# Altium PCB GC-Pcb.PcbDoc (part 1 of 3)
Units mm, origin at the board's own origin, x right, y up, seen from the top; angles counter-clockwise.
Board outline 75 x 40 mm, 4 copper layers (Top Copper, GND, PWR, Bottom Copper), stack 1.312 mm thick; 83 components, 62 nets, 306 pads, 137 vias.
Unrouted connection lines stored in the file: 2.
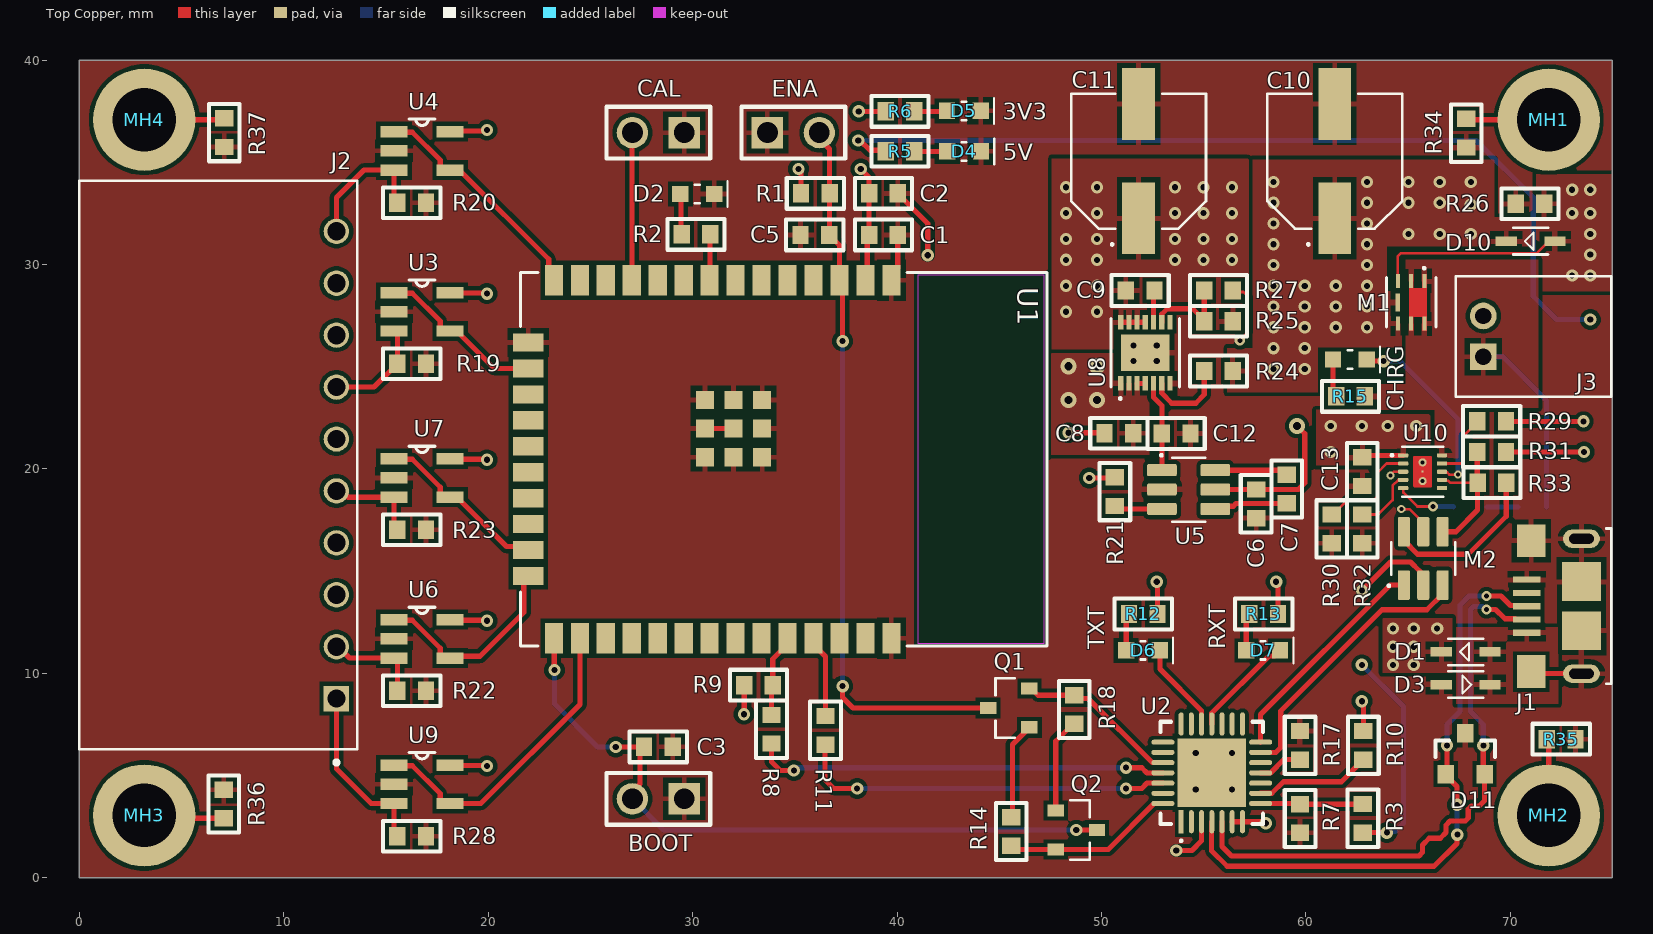
[diagram p0: Top Copper view]
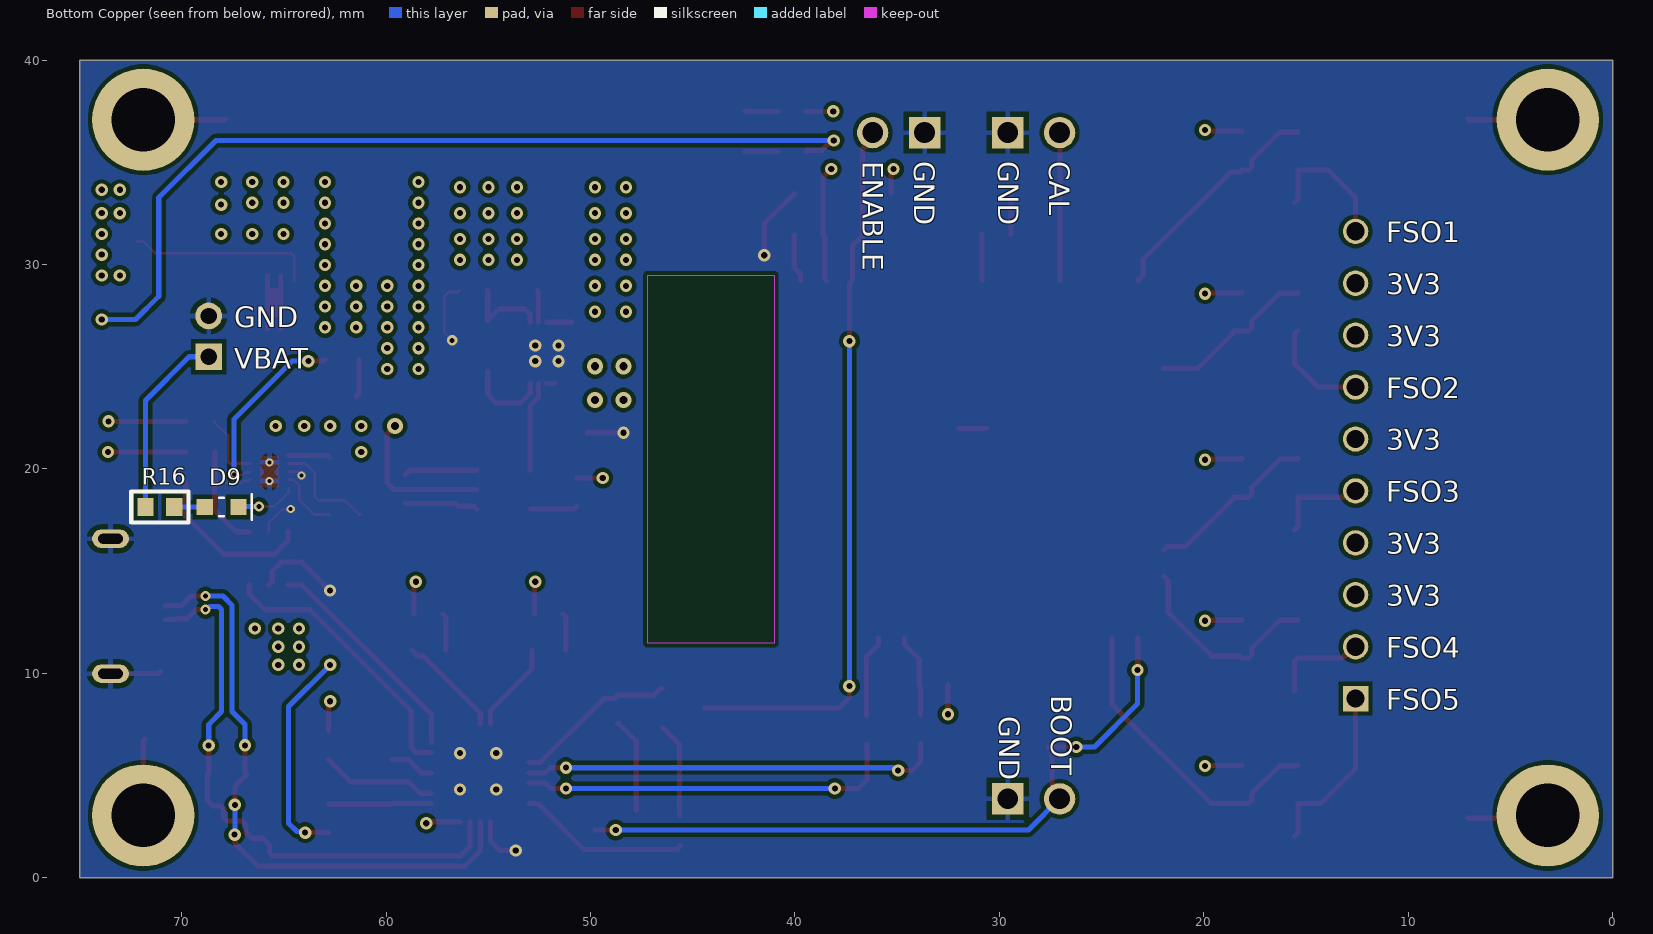
[diagram p1: Bottom Copper view, seen from below]
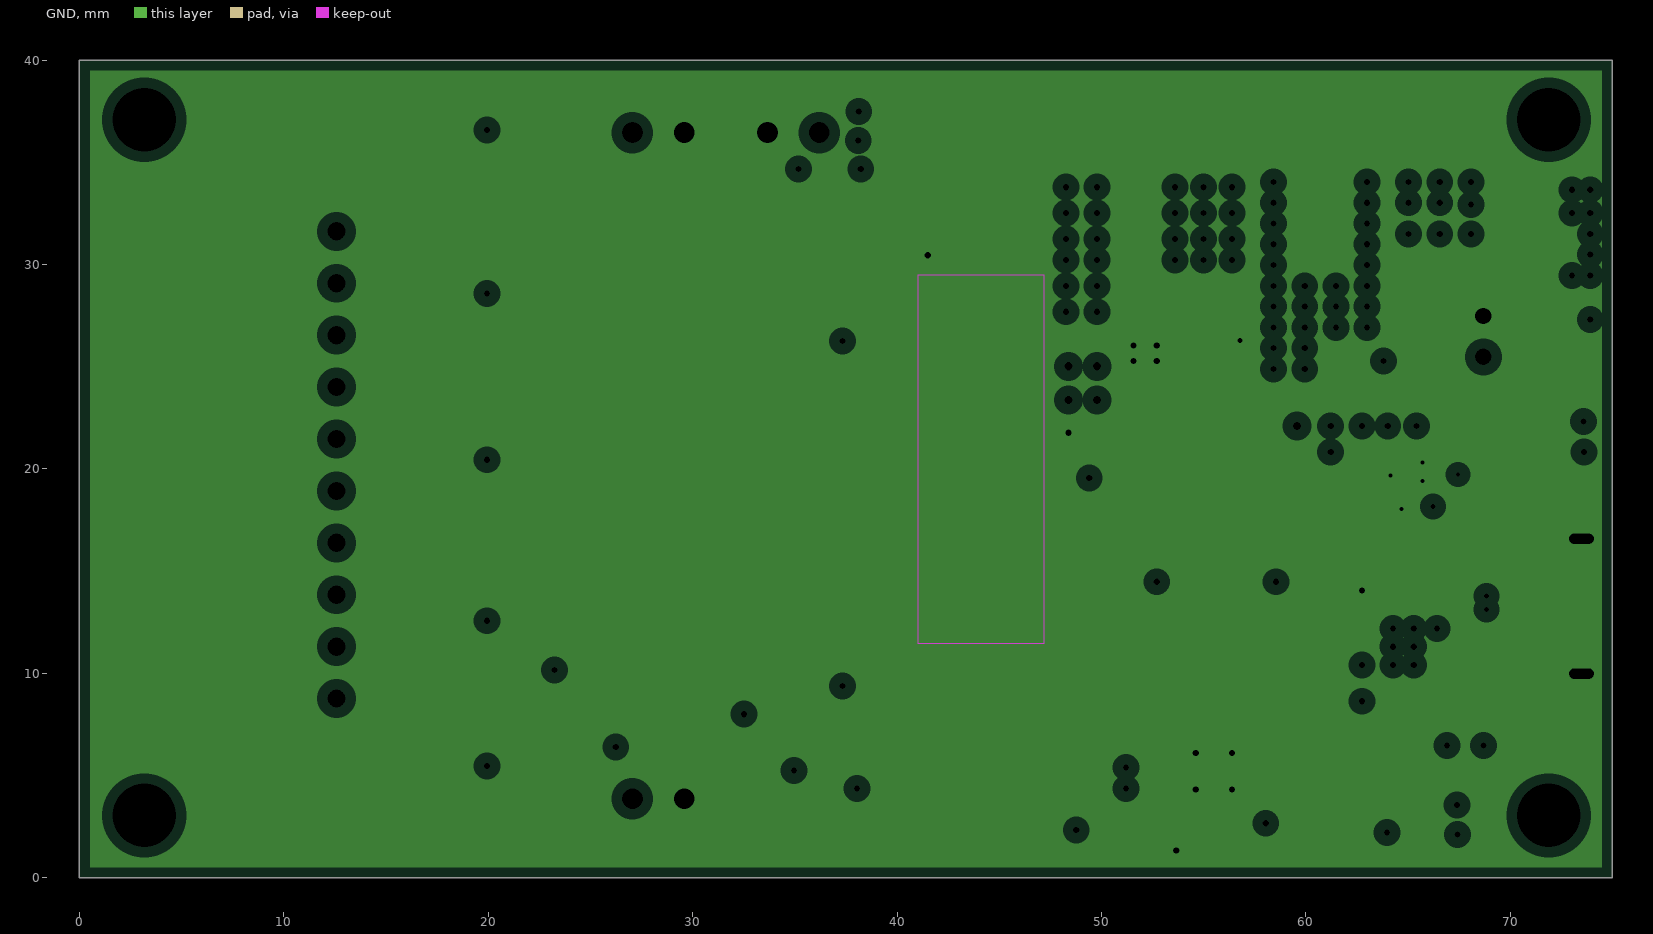
[diagram p2: GND, clearances drawn from the general rule]
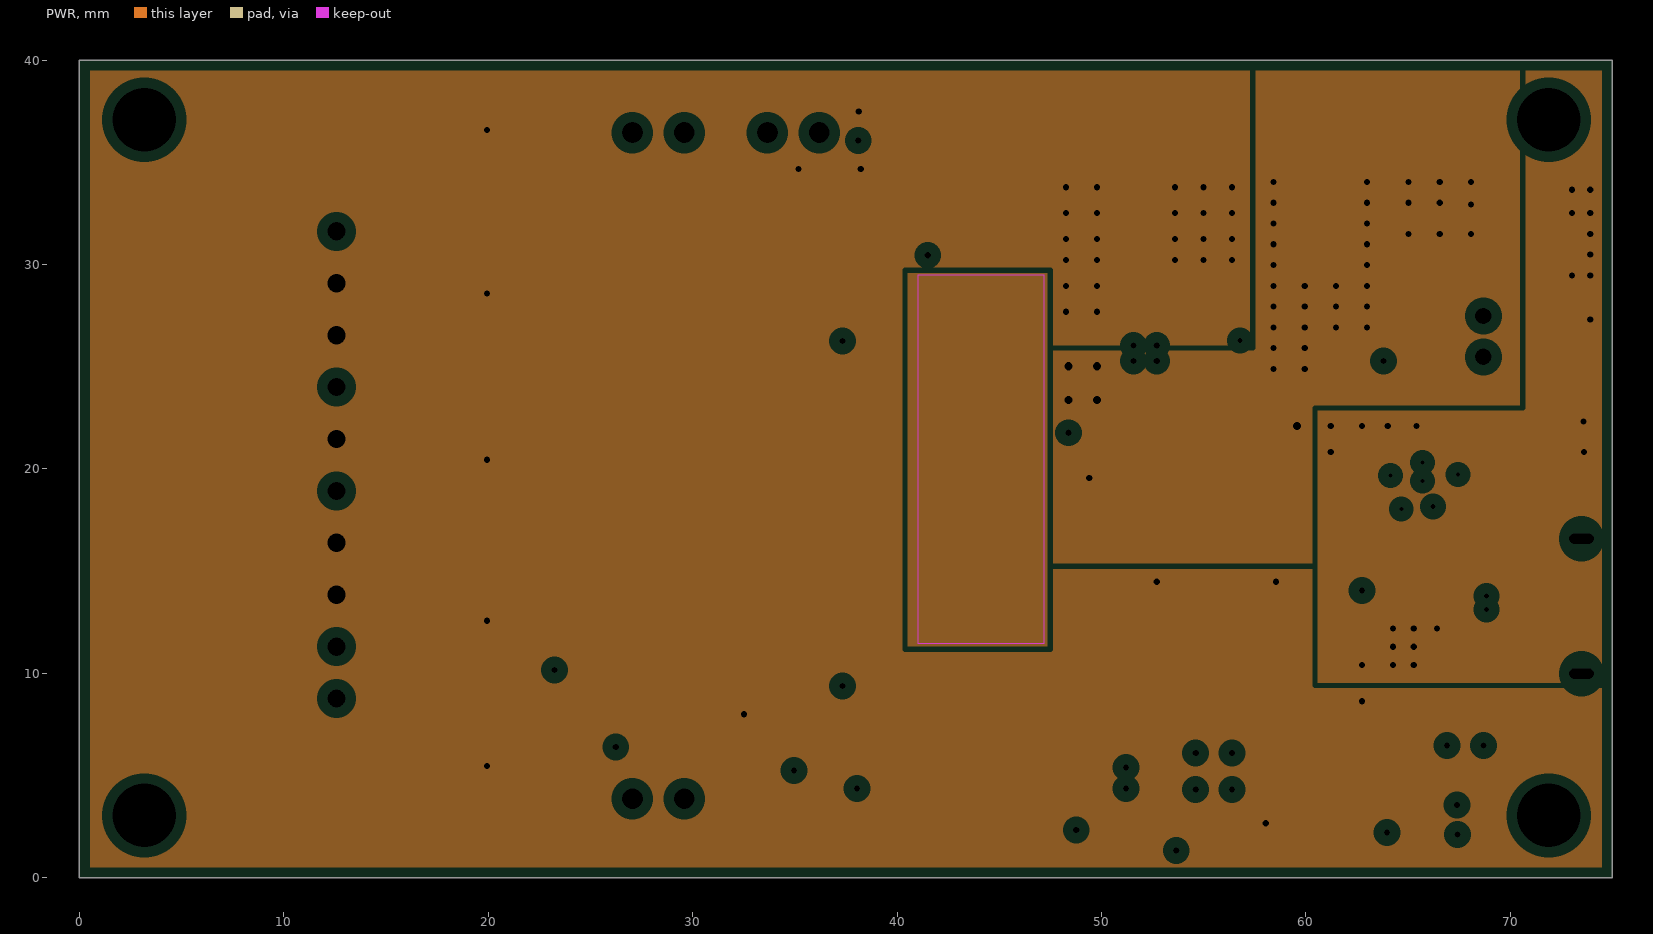
[diagram p3: PWR, clearances drawn from the general rule]
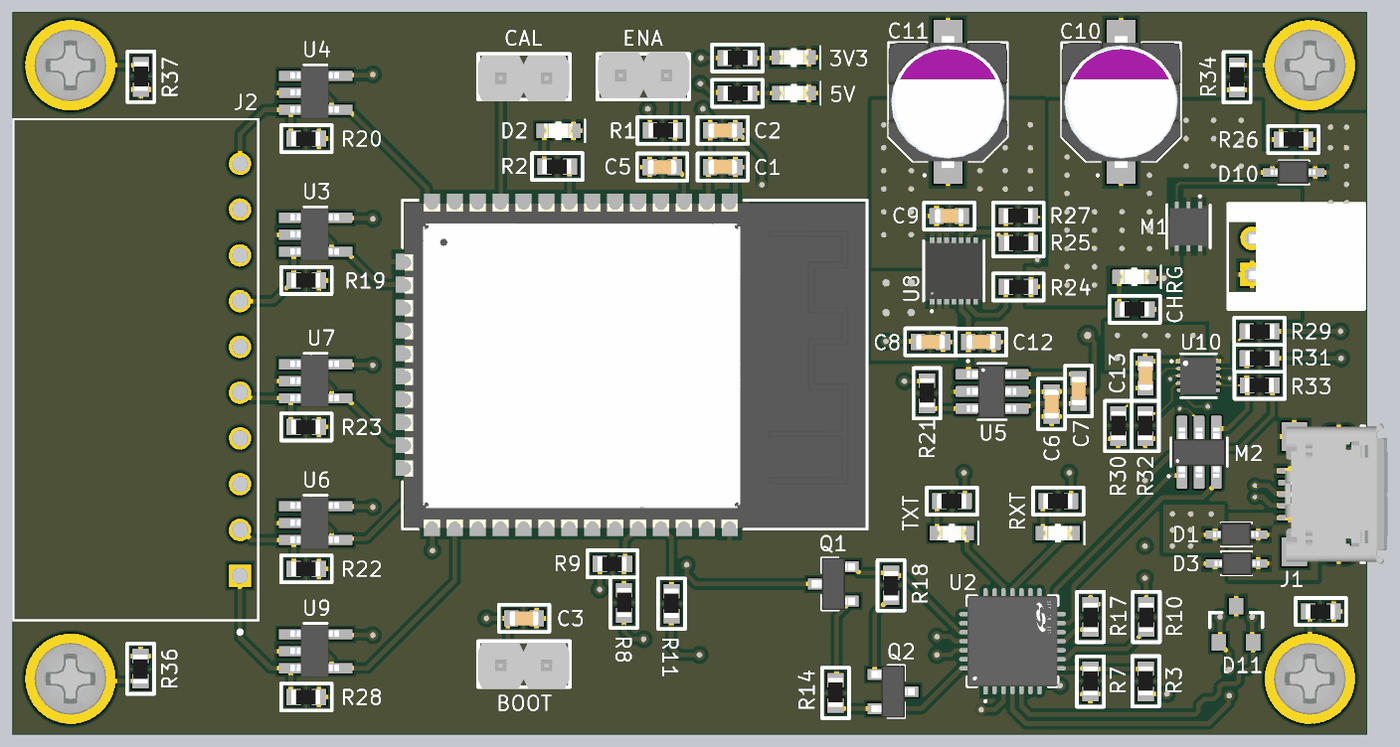
[diagram p5: 3D render of the assembled board from above, using the file's embedded part models]

## Layer stack, top to bottom
Top Mask: solder mask 0.015, Solder Resist, Dk 3.8
Top Copper: signal copper 0.035
Dielectric 1: prepreg 0.0711, PP-006, Dk 4.1
GND: plane copper 0.0175, net GND
Core: core 1.065, FR-4, Dk 4.5
PWR: plane copper 0.0175, net +3V3
Dielectric 2: prepreg 0.0711, PP-006, Dk 4.1
Bottom Copper: signal copper 0.035
Bottom Mask: solder mask 0.015, Solder Resist, Dk 3.8

## Board outline
0,0 0,40 75,40 75,0

## Design rules (kind name [scope] priority, off if disabled: settings)
Clearance "Clearance Bottom Layer" [OnLayer('Bottom Layer')] p1: gap=0.203 ignorepadtopadclearanceinfootprint=TRUE except(0.254: Arc-Text Track-Text SMDPad-Text THPad-Text Via-Text Fill-Text Poly-Text Region-Text Text-Text)
Clearance "Clearance Top Layer" [OnLayer('Top Layer')] p2: gap=0.203 ignorepadtopadclearanceinfootprint=TRUE except(0.254: Arc-Text Track-Text SMDPad-Text THPad-Text Via-Text Fill-Text Poly-Text Region-Text Text-Text)
Clearance [All] p3: gap=0.2 ignorepadtopadclearanceinfootprint=FALSE except(0.089: Arc-Arc Arc-Track Arc-SMDPad Track-Track Track-SMDPad SMDPad-SMDPad; 0.127: Arc-Via Track-Via SMDPad-Via THPad-Via Via-Via; 0.254: Arc-Text Track-Text SMDPad-Text THPad-Text Via-Text Fill-Text Poly-Text Region-Text Text-Text)
DiffPairsRouting [All] p1: maxlimit=0.254 minlimit=0.254 mostfreqgap=0.254 toplayer_minwidth=0.254 toplayer_maxwidth=0.381 toplayer_prefwidth=0.254 bottomlayer_minwidth=0.254 bottomlayer_maxwidth=0.381 bottomlayer_prefwidth=0.254 maxuncoupledlength=12.7
HoleSize [All] p1: absolutevalues=TRUE maxlimit=6.3 minlimit=0.2 maxpercent=80.000 minpercent=20.000
MinimumAnnularRing [All] p1: minimumring=0.076
MinimumSolderMaskSliver [All] p1: minsoldermaskwidth=0.1
PlaneClearance [All] p1: clearance=0.508
PlaneConnect PlaneConnect_1 [InNet('+3V3')] p1: pad.planeconnectstyle=Relief pad.reliefexpansion=0.508 pad.reliefentries=4 pad.reliefconductorwidth=0.254 pad.reliefairgap=0.254 via.planeconnectstyle=Direct via.reliefexpansion=0.508 via.reliefentries=4 via.reliefconductorwidth=0.254 via.reliefairgap=0.254
PlaneConnect [All] p2: planeconnectstyle=Direct reliefexpansion=0.508 reliefentries=4 reliefconductorwidth=0.254 reliefairgap=0.254
PolygonConnect PolygonConnect_1 [All] p1: thpad.connectstyle=Relief thpad.reliefconductorwidth=0.254 thpad.reliefentries=4 thpad.polygonreliefangle="90 Angle" thpad.airgapwidth=0.254 smdpad.connectstyle=Relief smdpad.reliefconductorwidth=0.254 smdpad.reliefentries=4 smdpad.polygonreliefangle="90 Angle" smdpad.airgapwidth=0.254 via.connectstyle=Direct via.reliefconductorwidth=0.508 via.reliefentries=4 via.polygonreliefangle="90 Angle" via.airgapwidth=0.254
RoutingCorners [All] p1: cornerstyle=Round minsetback=2.54 maxsetback=2.54
RoutingVias [All] p1: holewidth=0.5 width=1 viastyle="Through Hole" minholewidth=0.2 minwidth=0.45 maxholewidth=1 maxwidth=2
SilkToSilkClearance [All] p1: silktosilkclearance=0.1
SilkToSolderMaskClearance [IsPad] p1: minsilkscreentomaskgap=0.1 clearancetoexposedcopper=TRUE
SolderMaskExpansion [All] p1: expansion=0.102 istentingtop=FALSE
Width [All] p1: maxlimit=2.54 minlimit=0.089 preferedwidth=0.254 minimp=50.000000 maximp=50.000000 favimp=50.000000
22 further rules are at their usual default settings.

## Classes and differential pairs
component class GC-Sch: boot C1 C2 C3 C5 CAL CHRG D1 D2 D3 D4 D5 D6 D7 D9 D11 ENA J1 J2 J3 Q1 Q2 R1 R2 R3 R5 R6 R7 R8 R9 R10 R11 R12 R13 R14 R15 R16 R17 R18 TXT U1 U2
component class GC-Sch2: C6 C7 C8 C9 C10 C11 C12 C13 D10 M1 M2 MH1 MH2 MH3 MH4 R19 R20 R21 R22 R23 R24 R25 R26 R27 R28 R29 R30 R31 R32 R33 R34 R35 R36 R37 U3 U4 U5 U6 U7 U8 U9 U10
differential pair USB: +USB_P -USB_N

## Components (designator, comment, footprint, x,y, rotation, side; value= is the part's Value field where it differs from the comment)
BOOT "SW-61300211121" "2 PIN THROUGH HOLE - PITCH 2.54 MM" 28.321,3.861 r180 top (schematic designator SW1)
C1 "CL10B104JB8NNNC" 0603 39.333,31.445 r180 top
C2 "CL10A226MP8NUNE" 0603 39.333,33.477 r0 top
C3 "CL10B104JB8NNNC" 0603 28.321,6.401 r0 top
C5 "CL10B104JB8NNNC" 0603 35.978,31.445 r0 top
C6 "CL10B105KP8NNNC" "0603 - C" 57.566,18.292 r90 top
C7 "CL10B104JB8NNNC" "0603 - C" 59.065,19.014 r90 top
C8 "CL10B104JB8NNNC" 0603 50.851,21.742 r0 top
C9 "CL10B473KO8NNNC" "0603 - C" 51.892,28.727 r180 top
C10 "EEE-FP1E220AR" CC-25SVPF47M 61.417,35.052 r90 top
C11 "EEE-FP1E220AR" CC-25SVPF47M 51.816,35.052 r90 top
C12 "CL10B105KP8NNNC" 0603 53.654,21.732 r180 top
C13 "CL10B105KP8NNNC" "0603 - C" 62.763,19.863 r90 top
CAL "SW-61300211121" "2 PIN THROUGH HOLE - PITCH 2.54 MM" 28.321,36.449 r180 top (schematic designator SW3)
CHRG "SML-D12P8WT86" D-SML-D12U1WT86 62.154,25.349 r180 top (schematic designator D8)
D1 "D-BAT760-7" SOD2513X120N 67.818,11.049 r0 top
D2 "SML-D12P8WT86" D-SML-D12U1WT86 30.226,33.452 r180 top
D3 "CDSOD323-T05LC" SOD2513X120N 67.818,9.449 r180 top
D4 "SML-D12U1WT86" D-SML-D12U1WT86 43.282,35.535 r180 top
D5 "SML-D12U1WT86" D-SML-D12U1WT86 43.27,37.516 r180 top
D6 "SML-D12Y1WT86" D-SML-D12U1WT86 52.033,11.125 r180 top
D7 "SML-D12Y1WT86" D-SML-D12U1WT86 57.912,11.125 r180 top
D9 "SML-D12P8WT86" D-SML-D12U1WT86 68.047,18.136 r0 bottom
D10 "D-BAT760-7" SOD2513X120N 70.993,31.14 r0 top
D11 "SM05T1G" ONSC-SOT-23-3-318-08_V 67.793,6.071 r90 top
ENA "SW-61300211121" "2 PIN THROUGH HOLE - PITCH 2.54 MM" 34.925,36.449 r0 top (schematic designator SW2)
J1 "10118193-0001LF" AMPHENOL_10118193-0001LF 73.482,13.284 r90 top
J2 "105314-1110" TEMP 12.573,8.763 r270 top
J3 "S2B-PH-K-S" JST_S2B-PH-K-S(LF)(SN) 68.682,26.483 r90 top
M1 "SIA427ADJ-T1-GE3" SON_1DJ-T1-GE3_VIS 65.151,28.143 r90 top
M2 "FDC6561AN" SOT95P280X110-6N 65.743,15.621 r90 top
MH1 "M3 Screws" "M3 SCREWS" 71.882,37.084 r0 top
MH2 "M3 Screws" "M3 SCREWS" 71.882,3.048 r0 top
MH3 "M3 Screws" "M3 SCREWS" 3.175,3.048 r0 top
MH4 "M3 Screws" "M3 SCREWS" 3.175,37.084 r0 top
Q1 "SS8050-G" TRANS_SS8050-G 45.466,8.306 r180 top
Q2 "SS8050-G" TRANS_SS8050-G 48.774,2.337 r0 top
R1 "AC0603FR-1310KL" "0603 - R" 36.003,33.477 r0 top
R2 "R-RMCF0603JT220R" "0603 - R" 30.161,31.471 r180 top
R3 "RMCF0603FT22K1" "0603 - R" 62.789,2.907 r90 top
R5 "R-RMCF0603JT220R" "0603 - R" 40.146,35.535 r0 top
R6 "R-RMCF0603JT220R" "0603 - R" 40.146,37.49 r0 top
R7 "RC0402FR-0747K5L" "0603 - R" 59.715,2.896 r90 top
R8 "ERJ-3GEY0R00V" "0603 - R" 33.858,7.264 r90 top
R9 "AC0603FR-1310KL" "0603 - R" 33.223,9.423 r180 top
R10 "RC0603FR-071KL" "0603 - R" 62.814,6.477 r270 top
R11 "ERJ-3GEY0R00V" "0603 - R" 36.5,7.214 r90 top
R12 "R-RMCF0603JT220R" "0603 - R" 52.045,12.903 r180 top
R13 "R-RMCF0603JT220R" "0603 - R" 57.937,12.903 r180 top
R14 "AC0603FR-1310KL" "0603 - R" 45.593,2.261 r90 top
R15 "RC0603FR-071KL" "0603 - R" 62.179,23.546 r180 top
R16 "RC0603FR-071KL" "0603 - R" 71.069,18.136 r180 bottom
R17 "AC0603FR-1310KL" "0603 - R" 59.715,6.477 r270 top
R18 "AC0603FR-1310KL" "0603 - R" 48.666,8.23 r270 top
R19 "RC0603FR-07100KL" "0603 - R" 16.256,25.146 r180 top
R20 "RC0603FR-07100KL" "0603 - R" 16.256,33.02 r180 top
R21 "AC0603FR-1310KL" "0603 - R" 50.657,18.887 r90 top
R22 "RC0603FR-07100KL" "0603 - R" 16.256,9.144 r180 top
R23 "RC0603FR-07100KL" "0603 - R" 16.256,17.018 r180 top
R24 "AC0603FR-1310KL" "0603 - R" 55.728,24.79 r0 top
R25 "ERA-3AEB683V" "0603 - R" 55.728,27.229 r0 top
R26 "RC0603FR-07100KL" "0603 - R" 70.968,32.969 r0 top
R27 "ERA-3AEB153V" "0603 - R" 55.728,28.727 r180 top
R28 "RC0603FR-07100KL" "0603 - R" 16.256,2.032 r180 top
R29 "AC0603FR-1310KL" "0603 - R" 69.088,22.327 r0 top
R30 "ERJ-3EKF5600V" "0603 - R" 61.265,17.069 r90 top
R31 "ERA-3AEB683V" "0603 - R" 69.088,20.828 r0 top
R32 "RC0603FR-071KL" "0603 - R" 62.763,17.069 r90 top
R33 "ERA-3AEB153V" "0603 - R" 69.102,19.329 r180 top
R34 "ERJ-3GEY0R00V" "0603 - R" 67.843,36.424 r90 top
R35 "ERJ-3GEY0R00V" "0603 - R" 72.492,6.782 r180 top
R36 "ERJ-3GEY0R00V" "0603 - R" 7.061,3.607 r270 top
R37 "ERJ-3GEY0R00V" "0603 - R" 7.087,36.449 r90 top
U1 "ESP32-WROOM-32E-H4" ESP32­WROOM­32E_EXP 34.463,20.472 r270 top
U2 "CP2102N-A02-GQFN28" FP-CP2102N-A02-GQFN28-IPC_A 55.397,5.131 r90 top
U3 "MCP6071T-E/OT" SOT95P270X145-5N 16.764,27.686 r0 top
U4 "MCP6071T-E/OT" SOT95P270X145-5N 16.764,35.56 r0 top
U5 "REG71050DDCT" SOT95P280X110-6N 54.264,18.989 r0 top
U6 "MCP6071T-E/OT" SOT95P270X145-5N 16.764,11.684 r0 top
U7 "MCP6071T-E/OT" SOT95P270X145-5N 16.764,19.558 r0 top
U8 "MAX38909ATD+" 21-0137I_T1433-2_MXM 52.146,25.679 r90 top
U9 "MCP6071T-E/OT" SOT95P270X145-5N 16.764,4.572 r0 top
U10 "BQ24045DSQR" IC_BQ24045DSQR 65.71,19.863 r0 top

## Footprints (in the part's own frame and the unit in brackets; to place one, negate y for a bottom-side part, rotate by r counter-clockwise, add the part's x,y. Pads: shape width x height; smd on the part's side, far side on the other; paste and mask are expansions set on the pad)
"2 PIN THROUGH HOLE - PITCH 2.54 MM" [mm]
  rect 1.53x1.53 / inner round 1.53 / far side rect 1.53x1.53 hole 1.02: 1(-1.27,0)
  round 1.53 hole 1.02: 2(1.27,0)
  silkscreen extent -2.54,-1.27 2.54,1.27, body extent -2.51,-1.19 2.57,1.35, height 7.27
21-0137I_T1433-2_MXM [mil]
  rect 28x10 smd paste+0 mask+0: 1(-59,47.24) 2(-59,31.5) 3(-59,15.75) 4(-59,0) 5(-59,-15.75) 6(-59,-31.5) 7(-59,-47.24) 8(59,-47.24) 9(59,-31.5) 10(59,-15.75) 11(59,0) 12(59,15.75) 13(59,31.5) 14(59,47.24)
  rect 71x94 smd paste+0 mask+0: 15(0,0)
  silkscreen extent -90,-66 66,66, body extent -61,-61 61,61, height 32
0603 [mm]
  rect 0.8x0.9 smd: 1(-0.7,0) 2(0.7,0)
  silkscreen extent -1.4,-0.75 1.4,0.75, body extent -0.8,-0.41 0.8,0.39, height 0.8
"0603 - C" [mm]
  rect 0.8x0.9 smd: 1(-0.7,0) 2(0.7,0)
  silkscreen extent -1.4,-0.75 1.4,0.75, body extent -0.8,-0.41 0.8,0.39, height 0.8
"0603 - R" [mm]
  rect 0.8x0.9 smd: 1(-0.7,0) 2(0.7,0)
  silkscreen extent -1.4,-0.75 1.4,0.75, body extent -0.77,-0.4 0.83,0.4, height 0.45
AMPHENOL_10118193-0001LF [mm]
  rect 0.305x1.35 smd: 1(-1.3,2.675) 2(-0.65,2.675) 3(0,2.675) 4(0.65,2.675) 5(1.3,2.675)
  rect 1.6x1.4 smd: S1(-3.2,2.45) S2(3.2,2.45)
  rect 1.9x1.9 smd: S3(1.2,0) S4(-1.2,0)
  oval 0.9x1.8 hole 0.5 slot 1.2 at 90 deg: S5(-3.3,0) S6(3.3,0)
  silkscreen extent -3.8,-1.45 3.8,-1.22, body extent -3.92,-2.7 3.94,2.96, height 3.18
CC-25SVPF47M [mm]
  rect 3.5x1.6 smd: 1(-2.8,0) 2(2.8,0)
  silkscreen extent -4.12,-3.3 3.3,3.3, body extent -3.65,-3.3 3.65,3.3, height 5.9
D-SML-D12U1WT86 [mm]
  rect 0.8x0.8 smd: A(0.825,0) C(-0.825,0)
  silkscreen extent -1.47,-0.64 0.11,0.63, body extent -0.8,-0.4 0.8,0.4, height 0.55
ESP32­WROOM­32E_EXP [mil]
  rect 59x35 smd paste+0 mask+0: 1(-344.5,207.1) 2(-344.5,157.1) 3(-344.5,107.1) 4(-344.5,57.1) 5(-344.5,7.1) 6(-344.5,-42.9) 7(-344.5,-92.9) 8(-344.5,-142.9) 9(-344.5,-192.9) 10(-344.5,-242.9) 11(-344.5,-292.9) 12(-344.5,-342.9) 13(-344.5,-392.9) 14(-344.5,-442.9) 25(344.5,-442.9) 26(344.5,-392.9) 27(344.5,-342.9) 28(344.5,-292.9) 29(344.5,-242.9) 30(344.5,-192.9) 31(344.5,-142.9) 32(344.5,-92.9) 33(344.5,-42.9) 34(344.5,7.1) 35(344.5,57.1) 36(344.5,107.1) 37(344.5,157.1) 38(344.5,207.1)
  rect 35x59 smd paste+0 mask+0: 15(-225,-492.15) 16(-175,-492.15) 17(-125,-492.15) 18(-75,-492.15) 19(-25,-492.15) 20(25,-492.15) 21(75,-492.15) 22(125,-492.15) 23(175,-492.15) 24(225,-492.15)
  rect 35x35 smd paste+0 mask+0: 39(-59.1,-96.9) 40(-114.2,-41.8) 41(-114.2,-96.9) 42(-114.2,-152) 43(-59.1,-152) 44(-4,-152) 45(-4,-96.9) 46(-4,-41.8) 47(-59.1,-41.8)
  Keep-Out Layer region: 354.5,258 354.5,502 -354.5,502 -354.5,258
  silkscreen extent -360,-507 360,507, body extent -352,-502 356,502, height 128
FP-CP2102N-A02-GQFN28-IPC_A [mm]
  rect 1.131x0.242 smd paste+0 mask+0: 1(-2.391,1.5)
  rrect100% 1.131x0.242 smd paste+0 mask+0: 2(-2.391,1) 3(-2.391,0.5) 4(-2.391,0) 5(-2.391,-0.5) 6(-2.391,-1) 7(-2.391,-1.5) 15(2.391,-1.5) 16(2.391,-1) 17(2.391,-0.5) 18(2.391,0) 19(2.391,0.5) 20(2.391,1) 21(2.391,1.5)
  rrect100% 0.242x1.131 smd paste+0 mask+0: 8(-1.5,-2.391) 9(-1,-2.391) 10(-0.5,-2.391) 11(0,-2.391) 12(0.5,-2.391) 13(1,-2.391) 14(1.5,-2.391) 22(1.5,2.391) 23(1,2.391) 24(0.5,2.391) 25(0,2.391) 26(-0.5,2.391) 27(-1,2.391) 28(-1.5,2.391)
  rect 3.35x3.35 smd paste-1000 mask+0: 29(0,0)
  silkscreen extent -3.38,-2.5 2.5,2.5, body extent -3.46,-3.46 3.46,3.46, height 0.25
IC_BQ24045DSQR [mm]
  rrect50% 0.5x0.2 smd mask+0: 1(-0.95,0.8) 2(-0.95,0.4) 3(-0.95,0) 4(-0.95,-0.4) 5(-0.95,-0.8) 6(0.95,-0.8) 7(0.95,-0.4) 8(0.95,0) 9(0.95,0.4) 10(0.95,0.8)
  rect 0.1x0.1 smd paste-1 mask+0: 11(0,0)
  round 0.4 hole 0.2 mask+0: 12(0,0.457) 13(0,-0.457)
  Top Copper region: 0.408,0.749 0.41,0.749 0.413,0.748 0.415,0.748 0.418,0.747 0.42,0.746 0.423,0.745 0.425,0.743 0.427,0.742 0.429,0.74 0.431,0.739 0.433,0.737 0.435,0.735 0.437,0.733 0.439,0.731 0.44,0.729 0.442,0.727 0.443,0.725 0.445,0.723 0.446,0.72 0.447,0.718 0.448,0.715 0.448,0.713 0.449,0.71 0.449,0.708 0.45,0.705 0.45,0.703 0.45,0.7 0.45,-0.7 0.45,-0.703 0.45,-0.705 0.449,-0.708 0.449,-0.71 0.448,-0.713 0.448,-0.715 0.447,-0.718 0.446,-0.72 0.445,-0.723 0.443,-0.725 0.442,-0.727 0.44,-0.729 0.439,-0.731 0.437,-0.733 0.435,-0.735 0.433,-0.737 0.431,-0.739 0.429,-0.74 0.427,-0.742 0.425,-0.743 0.423,-0.745 0.42,-0.746 0.418,-0.747 0.415,-0.748 0.413,-0.748 0.41,-0.749 0.408,-0.749 0.405,-0.75 -0.405,-0.75 -0.408,-0.749 -0.41,-0.749 -0.413,-0.748 -0.415,-0.748 -0.418,-0.747 -0.42,-0.746 -0.423,-0.745 -0.425,-0.743 -0.427,-0.742 -0.429,-0.74 -0.431,-0.739 -0.433,-0.737 -0.435,-0.735 -0.437,-0.733 -0.439,-0.731 -0.44,-0.729 -0.442,-0.727 -0.443,-0.725 -0.445,-0.723 -0.446,-0.72 -0.447,-0.718 -0.448,-0.715 -0.448,-0.713 -0.449,-0.71 -0.449,-0.708 -0.45,-0.705 -0.45,-0.703 -0.45,-0.7 -0.45,0.7 -0.45,0.703 -0.45,0.705 -0.449,0.708 -0.449,0.71 -0.448,0.713 -0.448,0.715 -0.447,0.718 -0.446,0.72 -0.445,0.723 -0.443,0.725 -0.442,0.727 -0.44,0.729 -0.439,0.731 -0.437,0.733 -0.435,0.735 -0.433,0.737 -0.431,0.739 -0.429,0.74 -0.427,0.742 -0.425,0.743 -0.423,0.745 -0.42,0.746 -0.418,0.747 -0.415,0.748 -0.413,0.748 -0.41,0.749 -0.408,0.749 -0.405,0.75 0.405,0.75
  silkscreen extent -1.55,-1.22 1,1.22, body extent -1.02,-1.01 0.98,0.99, height 0.8
JST_S2B-PH-K-S(LF)(SN) [mm]
  rect 1.308x1.308 / inner round 1.308 / far side rect 1.308x1.308 hole 0.8: 1(-1,0)
  round 1.308 hole 0.8: 2(1,0)
  silkscreen extent -2.95,-6.25 2.95,1.35, body extent -2.98,-6.21 2.92,1.39, height 4.8
"M3 SCREWS" [mm]
  round 5 hole 3.1: 1(0,0)
  body extent -2,-2 2,2, height 1.71
ONSC-SOT-23-3-318-08_V [mm] "SOT23, 3-Leads, Body 2.92x1.3mm, Pitch 0.95mm"
  rect 0.9x0.8 smd: 1(-1,0.95) 2(-1,-0.95) 3(1,0)
  silkscreen extent -0.17,-1.46 0.65,1.46, body extent -0.65,-1.46 0.65,1.46, height 1.11
SOD2513X120N [mm]
  rect 1.04x0.46 smd: A(1.19,0) C(-1.19,0)
  silkscreen extent -0.85,-0.65 0.85,0.65, body extent -1.29,-0.64 1.21,0.66, height 1.2
SON_1DJ-T1-GE3_VIS [mil]
  rect 27x8 smd paste+0 mask+0: 1(41,-25.59) 2(41,0) 3(41,25.59) 4(-41,25.59) 5(-41,0) 6(-41,-25.59)
  rect 34x9 smd paste-17 mask-17: 7(0,26.14)
  Top Copper region: -54.5,-4 -54.5,4 54.5,4 54.5,-4 27.5,-4 27.5,-21.59 54.5,-21.59 54.5,-29.59 -54.5,-29.59 -54.5,-21.59 -27.5,-21.59 -27.5,-4
  silkscreen extent -48,-48 68,48, body extent -41,-40 40,40, height 31
SOT95P270X145-5N [mil]
  rect 52x22 smd: 1(-54,37) 2(-54,0) 3(-54,-37) 4(54,-37) 5(54,37)
  silkscreen extent -25,49 25,61, body extent -55,-56 51,58, height 57
SOT95P280X110-6N [mm]
  rrect25% 1.45x0.59 smd: 1(-1.305,0.95) 2(-1.305,0) 3(-1.305,-0.95) 4(1.305,-0.95) 5(1.305,0) 6(1.305,0.95)
  silkscreen extent -1.38,-1.57 0.8,1.73, body extent -1.4,-1.48 1.35,1.48, height 1.1
TEMP [mm]
  rect 1.24x1.24 hole 0.89: 1(0,0)
  round 1.24 hole 0.89: 2(-2.54,0) 3(-5.08,0) 4(-7.62,0) 5(-10.16,0) 6(-12.7,0) 7(-15.24,0) 8(-17.78,0) 9(-20.32,0) 10(-22.86,0)
  silkscreen extent -25.33,-12.57 3.22,1.02
TRANS_SS8050-G [mm]
  rect 0.8x0.6 smd: 1(-1.01,0.95) 2(-1.01,-0.95) 3(1.01,0)
  silkscreen extent -0.29,-1.45 0.65,1.45, body extent -1.2,-1.45 1.2,1.45, height 1.14

## Part data
BOOT CAL ENA: "Board Connector, 2 Contact(s), 1 Row(s), Male, Straight, 0.1 inch Pitch, Solder Terminal, Locking, Black Insulator, Plug", Contact Resistance=20mR, Dielectric Withstanding Voltage (AC)=500V, Flammability Rating="UL94 V-0", Insulation Color=Black, Insulation Resistance=1GR, Manufacturer="Wurth Electronics", Manufacturer Part Number=61300211121, Max Operating Temperature=125°C, Min Operating Temperature=-40°C, Rated Current (Signal)=3A, Supplier Part Number 1=20X0948, Body Breadth=0.1inch, Body Depth=0.1inch, Body Length=0.2inch, Body/Shell Style=PLUG, Category="Headers and Wire Housings", ComponentLink1description=https://datasheet.ciiva.com:443/pdfs/VipMasterIC/IC/MIDC/MIDCS07676/MIDCS07676-1.pdf?src-supplier=IHS+Markit, ComponentLink1URL=https://datasheet.ciiva.com:443/pdfs/VipMasterIC/IC/MIDC/MIDCS07676/MIDCS07676-1.pdf?src-supplier=IHS+Markit, ComponentLink2description=https://datasheet.ciiva.com/13619/6130xx11121-48870-13619345.pdf?src-supplier=Mouser, ComponentLink2URL=https://datasheet.ciiva.com/13619/6130xx11121-48870-13619345.pdf?src-supplier=Mouser, Connector Type="BOARD CONNECTOR", Contact Finish - Mating=GOLD, Contact Finish - Termination="Gold (Au) - with Nickel (Ni) barrier", Contact Gender=Male, Contact Material="Copper Alloy", Contact Pattern=RECTANGULAR, Contact Style="SQ PIN-SKT", DIN Conformance=No, Filter Feature=No, IEC Conformance=No, Insulation Material=Polybutylene, JESD-609 Code=e4, Mating Contact Pitch=0.1inch, MIL Conformance=No, Mixed Contacts=No, Mount=Board, Mounting Option 1=LOCKING, Mounting Style=STRAIGHT, Number Of Connectors=1, Number of Contacts=2, Number of Rows Loaded=1, Option="General Purpose", PCB Contact Pattern=RECTANGULAR, Pricing="100=0.074 (USD)", Reach SVHC Compliant=Yes, Reference Standard=UL, Reliability=COMMERCIAL, RoHS=Yes, RoHS Compliant=Yes, Stock=158075, Supplier 1=Newark, Terminal Length=0.118inch, Terminal Pitch=2.54mm, Termination=Solder
C1 C5: "Ceramic Capacitor, Multilayer, Ceramic, 50V, 5% +Tol, 5% -Tol, X7R, 15% TC, 0.1uF, Surface Mount, 0603", Capacitance=0.1uF, Capacitor Type=Ceramic, Manufacturer=Samsung, Max Operating Temperature=125°C, Min Operating Temperature=-55°C, Negative Tolerance=5%, Package Shape=Rectangular, Package Style=SMTMeter, Rated DC Voltage (URdc)=50V, Temperature Characteristics Code=X7R, Category="Ceramic Capacitors", ComponentLink1description=https://datasheet.ciiva.com:443/pdfs/VipMasterIC/IC/SEMS/SEMS-S-A0008384515/SEMS-S-A0008873313-1.pdf?src-supplier=IHS+Markit, ComponentLink1URL=https://datasheet.ciiva.com:443/pdfs/VipMasterIC/IC/SEMS/SEMS-S-A0008384515/SEMS-S-A0008873313-1.pdf?src-supplier=IHS+Markit, ComponentLink2description=https://datasheet.ciiva.com/16498/cl10b104jb8nnnc-16498485.pdf?src-supplier=Future+Electronics, ComponentLink2URL=https://datasheet.ciiva.com/16498/cl10b104jb8nnnc-16498485.pdf?src-supplier=Future+Electronics, ComponentLink3Description=https://datasheet.ciiva.com/26838/getdatasheetpartid-359321-26838402.pdf?src-supplier=Verical, ComponentLink3URL=https://datasheet.ciiva.com/26838/getdatasheetpartid-359321-26838402.pdf?src-supplier=Verical, ComponentLink4Description=https://datasheet.ciiva.com/25793/cl10b104jb8nnnc-25793394.pdf?src-supplier=Digikey, ComponentLink4URL=https://datasheet.ciiva.com/25793/cl10b104jb8nnnc-25793394.pdf?src-supplier=Digikey, ComponentLink5Description=https://datasheet.ciiva.com/29199/456613-da-01-en-vs-kondensator-0603-29199008.pdf?src-supplier=Conrad, ComponentLink5URL=https://datasheet.ciiva.com/29199/456613-da-01-en-vs-kondensator-0603-29199008.pdf?src-supplier=Conrad, Dielectric Material=Ceramic, Height=0.8mm, JESD-609 Code=e3, Length=1.6mm, Manufacturer Part Number=CL10B104JB8NNNC, Mount="Surface Mount", Multilayer=Yes, Number of Pins=2, Packaging="Tape and Reel", Positive Tolerance=5%, Pricing="4000=0.00545, 8000=0.00532, 16000=0.0052, 24000=0.00507, 32000=0.00495 (USD)", Reach SVHC Compliant=Yes, RoHS=Yes, RoHS Compliant=Yes, Size Code=0603, Stock=4000, Supplier 1=Avnet, Supplier Part Number 1=CL10B104JB8NNNC, Terminal Finish=Nickel, Termination=Wraparound, Width=0.8mm
C2: "Ceramic Capacitor, Multilayer, Ceramic, 10V, 20% +Tol, 20% -Tol, X5R, 15% TC, 22uF, Surface Mount, 0603", Capacitance=22uF, Capacitor Type=Ceramic, Manufacturer=Samsung, Max Operating Temperature=85°C, Min Operating Temperature=-55°C, Negative Tolerance=20%, Package Shape=Rectangular, Package Style=SMTMeter, Rated DC Voltage (URdc)=10V, Temperature Characteristics Code=X5R, Category="Ceramic Capacitors", ComponentLink1description=https://datasheet.ciiva.com:443/pdfs/VipMasterIC/IC/SEMS/SEMS-S-A0008525088/SEMS-S-A0008525102-1.pdf?src-supplier=IHS+Markit, ComponentLink1URL=https://datasheet.ciiva.com:443/pdfs/VipMasterIC/IC/SEMS/SEMS-S-A0008525088/SEMS-S-A0008525102-1.pdf?src-supplier=IHS+Markit, ComponentLink2description=https://datasheet.ciiva.com/25711/cl10a226mp8nune-25711532.pdf?src-supplier=Digikey, ComponentLink2URL=https://datasheet.ciiva.com/25711/cl10a226mp8nune-25711532.pdf?src-supplier=Digikey, ComponentLink3Description=https://datasheet.ciiva.com/26838/getdatasheetpartid-746477-26838370.pdf?src-supplier=Verical, ComponentLink3URL=https://datasheet.ciiva.com/26838/getdatasheetpartid-746477-26838370.pdf?src-supplier=Verical, Dielectric Material=Ceramic, Height=1.05mm, JESD-609 Code=e3, Length=1.6mm, Manufacturer Part Number=CL10A226MP8NUNE, Mount="Surface Mount", Multilayer=Yes, Number of Pins=2, Packaging="Tape and Reel", Positive Tolerance=20%, Pricing="3000=0.02125, 6000=0.02076, 12000=0.02027, 18000=0.01978, 24000=0.01929 (USD)", Reach SVHC Compliant=Yes, RoHS=Yes, RoHS Compliant=Yes, Size Code=0603, Stock=4766000, Supplier 1=Avnet, Supplier Part Number 1=CL10A226MP8NUNE, Terminal Finish=Nickel, Termination=Wraparound, Width=0.8mm
C3 C8: library part C-CL10B104JB8NNNC, "Ceramic Capacitor, Multilayer, Ceramic, 50V, 5% +Tol, 5% -Tol, X7R, 15% TC, 0.1uF, Surface Mount, 0603", Capacitance=0.1uF, Capacitor Type=Ceramic, Manufacturer=Samsung, Max Operating Temperature=125°C, Min Operating Temperature=-55°C, Negative Tolerance=5%, Package Shape=Rectangular, Package Style=SMTMeter, Rated DC Voltage (URdc)=50V, Temperature Characteristics Code=X7R, Category="Ceramic Capacitors", ComponentLink1description=https://datasheet.ciiva.com:443/pdfs/VipMasterIC/IC/SEMS/SEMS-S-A0008384515/SEMS-S-A0008873313-1.pdf?src-supplier=IHS+Markit, ComponentLink1URL=https://datasheet.ciiva.com:443/pdfs/VipMasterIC/IC/SEMS/SEMS-S-A0008384515/SEMS-S-A0008873313-1.pdf?src-supplier=IHS+Markit, ComponentLink2description=https://datasheet.ciiva.com/16498/cl10b104jb8nnnc-16498485.pdf?src-supplier=Future+Electronics, ComponentLink2URL=https://datasheet.ciiva.com/16498/cl10b104jb8nnnc-16498485.pdf?src-supplier=Future+Electronics, ComponentLink3Description=https://datasheet.ciiva.com/26838/getdatasheetpartid-359321-26838402.pdf?src-supplier=Verical, ComponentLink3URL=https://datasheet.ciiva.com/26838/getdatasheetpartid-359321-26838402.pdf?src-supplier=Verical, ComponentLink4Description=https://datasheet.ciiva.com/25793/cl10b104jb8nnnc-25793394.pdf?src-supplier=Digikey, ComponentLink4URL=https://datasheet.ciiva.com/25793/cl10b104jb8nnnc-25793394.pdf?src-supplier=Digikey, ComponentLink5Description=https://datasheet.ciiva.com/29199/456613-da-01-en-vs-kondensator-0603-29199008.pdf?src-supplier=Conrad, ComponentLink5URL=https://datasheet.ciiva.com/29199/456613-da-01-en-vs-kondensator-0603-29199008.pdf?src-supplier=Conrad, Dielectric Material=Ceramic, Height=0.8mm, JESD-609 Code=e3, Length=1.6mm, Manufacturer Part Number=CL10B104JB8NNNC, Mount="Surface Mount", Multilayer=Yes, Number of Pins=2, Packaging="Tape and Reel", Positive Tolerance=5%, Pricing="4000=0.00545, 8000=0.00532, 16000=0.0052, 24000=0.00507, 32000=0.00495 (USD)", Reach SVHC Compliant=Yes, RoHS=Yes, RoHS Compliant=Yes, Size Code=0603, Stock=4000, Supplier 1=Avnet, Supplier Part Number 1=CL10B104JB8NNNC, Terminal Finish=Nickel, Termination=Wraparound, Width=0.8mm
C6 C13: library part CC-CL10B105KP8NNNC, "Ceramic Capacitor, Multilayer, Ceramic, 10V, 10% +Tol, 10% -Tol, X7R, 15% TC, 1uF, Surface Mount, 0603", Capacitance=1uF, Capacitor Type=Ceramic, Manufacturer=Samsung, Max Operating Temperature=125°C, Min Operating Temperature=-55°C, Negative Tolerance=10%, Package Shape=Rectangular, Package Style=SMTMeter, Rated DC Voltage (URdc)=10V, Temperature Characteristics Code=X7R, Category="Ceramic Capacitors", ComponentLink1description=https://datasheet.ciiva.com:443/pdfs/VipMasterIC/IC/SEMS/SEMS-S-A0008526420/SEMS-S-A0008526450-1.pdf?src-supplier=IHS+Markit, ComponentLink1URL=https://datasheet.ciiva.com:443/pdfs/VipMasterIC/IC/SEMS/SEMS-S-A0008526420/SEMS-S-A0008526450-1.pdf?src-supplier=IHS+Markit, ComponentLink2description=https://datasheet.ciiva.com/25788/cl10b105kp8nnnc-25788304.pdf?src-supplier=Digikey, ComponentLink2URL=https://datasheet.ciiva.com/25788/cl10b105kp8nnnc-25788304.pdf?src-supplier=Digikey, ComponentLink3Description=https://datasheet.ciiva.com/16396/cl10b105kp8nnnc-16396970.pdf?src-supplier=Future+Electronics, ComponentLink3URL=https://datasheet.ciiva.com/16396/cl10b105kp8nnnc-16396970.pdf?src-supplier=Future+Electronics, ComponentLink4Description=https://datasheet.ciiva.com/26838/getdatasheetpartid-358410-26838426.pdf?src-supplier=Verical, ComponentLink4URL=https://datasheet.ciiva.com/26838/getdatasheetpartid-358410-26838426.pdf?src-supplier=Verical, Dielectric Material=Ceramic, Height=0.9mm, JESD-609 Code=e3, Length=1.6mm, Manufacturer Part Number=CL10B105KP8NNNC, Mount="Surface Mount", Multilayer=Yes, Number of Pins=2, Packaging="Tape and Reel", Positive Tolerance=10%, Pricing="4000=0.00532, 8000=0.0052, 16000=0.00508, 24000=0.00496, 32000=0.00484 (USD)", Reach SVHC Compliant=Yes, RoHS=Yes, RoHS Compliant=Yes, Size Code=0603, Stock=168000, Supplier 1=Avnet, Supplier Part Number 1=CL10B105KP8NNNC, Terminal Finish=Nickel, Termination=Wraparound, Width=0.8mm
C7: library part CC-CL10B104JB8NNNC, "Ceramic Capacitor, Multilayer, Ceramic, 50V, 5% +Tol, 5% -Tol, X7R, 15% TC, 0.1uF, Surface Mount, 0603", Capacitance=0.1uF, Capacitor Type=Ceramic, Manufacturer=Samsung, Max Operating Temperature=125°C, Min Operating Temperature=-55°C, Negative Tolerance=5%, Package Shape=Rectangular, Package Style=SMTMeter, Rated DC Voltage (URdc)=50V, Temperature Characteristics Code=X7R, Category="Ceramic Capacitors", ComponentLink1description=https://datasheet.ciiva.com:443/pdfs/VipMasterIC/IC/SEMS/SEMS-S-A0008384515/SEMS-S-A0008873313-1.pdf?src-supplier=IHS+Markit, ComponentLink1URL=https://datasheet.ciiva.com:443/pdfs/VipMasterIC/IC/SEMS/SEMS-S-A0008384515/SEMS-S-A0008873313-1.pdf?src-supplier=IHS+Markit, ComponentLink2description=https://datasheet.ciiva.com/16498/cl10b104jb8nnnc-16498485.pdf?src-supplier=Future+Electronics, ComponentLink2URL=https://datasheet.ciiva.com/16498/cl10b104jb8nnnc-16498485.pdf?src-supplier=Future+Electronics, ComponentLink3Description=https://datasheet.ciiva.com/26838/getdatasheetpartid-359321-26838402.pdf?src-supplier=Verical, ComponentLink3URL=https://datasheet.ciiva.com/26838/getdatasheetpartid-359321-26838402.pdf?src-supplier=Verical, ComponentLink4Description=https://datasheet.ciiva.com/25793/cl10b104jb8nnnc-25793394.pdf?src-supplier=Digikey, ComponentLink4URL=https://datasheet.ciiva.com/25793/cl10b104jb8nnnc-25793394.pdf?src-supplier=Digikey, ComponentLink5Description=https://datasheet.ciiva.com/29199/456613-da-01-en-vs-kondensator-0603-29199008.pdf?src-supplier=Conrad, ComponentLink5URL=https://datasheet.ciiva.com/29199/456613-da-01-en-vs-kondensator-0603-29199008.pdf?src-supplier=Conrad, Dielectric Material=Ceramic, Height=0.8mm, JESD-609 Code=e3, Length=1.6mm, Manufacturer Part Number=CL10B104JB8NNNC, Mount="Surface Mount", Multilayer=Yes, Number of Pins=2, Packaging="Tape and Reel", Positive Tolerance=5%, Pricing="4000=0.00545, 8000=0.00532, 16000=0.0052, 24000=0.00507, 32000=0.00495 (USD)", Reach SVHC Compliant=Yes, RoHS=Yes, RoHS Compliant=Yes, Size Code=0603, Stock=4000, Supplier 1=Avnet, Supplier Part Number 1=CL10B104JB8NNNC, Terminal Finish=Nickel, Termination=Wraparound, Width=0.8mm
C9: library part CC-CL10B473KO8NNNC, "Ceramic Capacitor, Multilayer, Ceramic, 16V, 10% +Tol, 10% -Tol, X7R, 15% TC, 0.047uF, Surface Mount, 0603", Capacitance=47nF, Capacitor Type=Ceramic, Manufacturer=Samsung, Max Operating Temperature=125°C, Min Operating Temperature=-55°C, Negative Tolerance=10%, Package Shape=Rectangular, Package Style=SMTMeter, Rated DC Voltage (URdc)=16V, Temperature Characteristics Code=X7R, Category="Ceramic Capacitors", ComponentLink1description=https://datasheet.ciiva.com:443/pdfs/VipMasterIC/IC/SEMS/SEMS-S-A0008521219/SEMS-S-A0008521235-1.pdf?src-supplier=IHS+Markit, ComponentLink1URL=https://datasheet.ciiva.com:443/pdfs/VipMasterIC/IC/SEMS/SEMS-S-A0008521219/SEMS-S-A0008521235-1.pdf?src-supplier=IHS+Markit, ComponentLink2description=https://datasheet.ciiva.com/15195/getdatasheetpartid-354053-15195766.pdf?src-supplier=Verical, ComponentLink2URL=https://datasheet.ciiva.com/15195/getdatasheetpartid-354053-15195766.pdf?src-supplier=Verical, Dielectric Material=Ceramic, Height=0.8mm, JESD-609 Code=e3, Length=1.6mm, Manufacturer Part Number=CL10B473KO8NNNC, Mount="Surface Mount", Multilayer=Yes, Number of Pins=2, Packaging="Tape and Reel", Positive Tolerance=10%, Pricing="4000=0.00536, 8000=0.00524, 16000=0.00511, 24000=0.00499, 32000=0.00487 (USD)", Reach SVHC Compliant=Yes, RoHS=Yes, RoHS Compliant=Yes, Size Code=0603, Stock=4000, Supplier 1=Avnet, Supplier Part Number 1=CL10B473KO8NNNC, Terminal Finish=Nickel, Termination=Wraparound, Width=0.8mm
C10: library part C-EEE-FP1E220AR, "Aluminum Electrolytic Capacitor, Polarized, Aluminum (wet), 25V, 20% +Tol, 20% -Tol, 22uF, Surface Mount, 2121", Capacitance=22uF, Capacitor Type=Aluminium, ESR (Equivalent Series Resistance)=360mR, Leakage Current=5.5uA, Manufacturer=Panasonic, Manufacturer Series=FP, Max Operating Temperature=105°C, Min Operating Temperature=-55°C, Negative Tolerance=20%, Package Shape=Cylindrical, Package Style=SMTMeter, Rated DC Voltage (URdc)=25V, Ripple Current=240mA, Supplier Part Number 1=667-EEE-FP1E220AR, Category="Aluminum Electrolytic Capacitors", ComponentLink1description=https://datasheet.ciiva.com:443/pdfs/VipMasterIC/IC/PANA/PANA-S-A0009615249/PANA-S-A0009615249-1.pdf?src-supplier=IHS+Markit, ComponentLink1URL=https://datasheet.ciiva.com:443/pdfs/VipMasterIC/IC/PANA/PANA-S-A0009615249/PANA-S-A0009615249-1.pdf?src-supplier=IHS+Markit, ComponentLink2description=https://datasheet.ciiva.com/48523/fp-eng-tds-48523749.pdf?src-supplier=Distrelec, ComponentLink2URL=https://datasheet.ciiva.com/48523/fp-eng-tds-48523749.pdf?src-supplier=Distrelec, ComponentLink3Description=https://datasheet.ciiva.com/16390/aba0000ce114-16390486.pdf?src-supplier=Future+Electronics, ComponentLink3URL=https://datasheet.ciiva.com/16390/aba0000ce114-16390486.pdf?src-supplier=Future+Electronics, ComponentLink4Description=https://datasheet.ciiva.com/15166/getdatasheetpartid-178535-15166251.pdf?src-supplier=Verical, ComponentLink4URL=https://datasheet.ciiva.com/15166/getdatasheetpartid-178535-15166251.pdf?src-supplier=Verical, Dielectric Material=Aluminium, Height=5.8mm, JESD-609 Code=e3,e6, Length=6.5mm, Manufacturer Part Number=EEE-FP1E220AR, Mount="Surface Mount", Number of Pins=2, Packaging="Tape and Reel", Polarity=Polarized, Positive Tolerance=20%, Pricing="1=0.5, 10=0.271, 50=0.271, 100=0.175, 1000=0.134, 10000=0.114 (USD)", Reach SVHC Compliant=Yes, RoHS=Yes, RoHS Compliant=Yes, Series="EEE-FP(LF REFLOW)", Size Code=2121, Stock=28900, Supplier 1=Mouser, Tan Delta=0.14, Terminal Finish=Tin, Termination=Flat, Width=5.3mm
C11: library part CC-EEE-FP1E220AR, "Aluminum Electrolytic Capacitor, Polarized, Aluminum (wet), 25V, 20% +Tol, 20% -Tol, 22uF, Surface Mount, 2121", Capacitance=22uF, Capacitor Type=Aluminium, ESR (Equivalent Series Resistance)=360mR, Leakage Current=5.5uA, Manufacturer=Panasonic, Manufacturer Series=FP, Max Operating Temperature=105°C, Min Operating Temperature=-55°C, Negative Tolerance=20%, Package Shape=Cylindrical, Package Style=SMTMeter, Rated DC Voltage (URdc)=25V, Ripple Current=240mA, Supplier Part Number 1=667-EEE-FP1E220AR, Category="Aluminum Electrolytic Capacitors", ComponentLink1description=https://datasheet.ciiva.com:443/pdfs/VipMasterIC/IC/PANA/PANA-S-A0009615249/PANA-S-A0009615249-1.pdf?src-supplier=IHS+Markit, ComponentLink1URL=https://datasheet.ciiva.com:443/pdfs/VipMasterIC/IC/PANA/PANA-S-A0009615249/PANA-S-A0009615249-1.pdf?src-supplier=IHS+Markit, ComponentLink2description=https://datasheet.ciiva.com/48523/fp-eng-tds-48523749.pdf?src-supplier=Distrelec, ComponentLink2URL=https://datasheet.ciiva.com/48523/fp-eng-tds-48523749.pdf?src-supplier=Distrelec, ComponentLink3Description=https://datasheet.ciiva.com/16390/aba0000ce114-16390486.pdf?src-supplier=Future+Electronics, ComponentLink3URL=https://datasheet.ciiva.com/16390/aba0000ce114-16390486.pdf?src-supplier=Future+Electronics, ComponentLink4Description=https://datasheet.ciiva.com/15166/getdatasheetpartid-178535-15166251.pdf?src-supplier=Verical, ComponentLink4URL=https://datasheet.ciiva.com/15166/getdatasheetpartid-178535-15166251.pdf?src-supplier=Verical, Dielectric Material=Aluminium, Height=5.8mm, JESD-609 Code=e3,e6, Length=6.5mm, Manufacturer Part Number=EEE-FP1E220AR, Mount="Surface Mount", Number of Pins=2, Packaging="Tape and Reel", Polarity=Polarized, Positive Tolerance=20%, Pricing="1=0.5, 10=0.271, 50=0.271, 100=0.175, 1000=0.134, 10000=0.114 (USD)", Reach SVHC Compliant=Yes, RoHS=Yes, RoHS Compliant=Yes, Series="EEE-FP(LF REFLOW)", Size Code=2121, Stock=28900, Supplier 1=Mouser, Tan Delta=0.14, Terminal Finish=Tin, Termination=Flat, Width=5.3mm
C12: library part C-CL10B105KP8NNNC, "Ceramic Capacitor, Multilayer, Ceramic, 10V, 10% +Tol, 10% -Tol, X7R, 15% TC, 1uF, Surface Mount, 0603", Capacitance=1uF, Capacitor Type=Ceramic, Manufacturer=Samsung, Max Operating Temperature=125°C, Min Operating Temperature=-55°C, Negative Tolerance=10%, Package Shape=Rectangular, Package Style=SMTMeter, Rated DC Voltage (URdc)=10V, Temperature Characteristics Code=X7R, Category="Ceramic Capacitors", ComponentLink1description=https://datasheet.ciiva.com:443/pdfs/VipMasterIC/IC/SEMS/SEMS-S-A0008526420/SEMS-S-A0008526450-1.pdf?src-supplier=IHS+Markit, ComponentLink1URL=https://datasheet.ciiva.com:443/pdfs/VipMasterIC/IC/SEMS/SEMS-S-A0008526420/SEMS-S-A0008526450-1.pdf?src-supplier=IHS+Markit, ComponentLink2description=https://datasheet.ciiva.com/25788/cl10b105kp8nnnc-25788304.pdf?src-supplier=Digikey, ComponentLink2URL=https://datasheet.ciiva.com/25788/cl10b105kp8nnnc-25788304.pdf?src-supplier=Digikey, ComponentLink3Description=https://datasheet.ciiva.com/16396/cl10b105kp8nnnc-16396970.pdf?src-supplier=Future+Electronics, ComponentLink3URL=https://datasheet.ciiva.com/16396/cl10b105kp8nnnc-16396970.pdf?src-supplier=Future+Electronics, ComponentLink4Description=https://datasheet.ciiva.com/26838/getdatasheetpartid-358410-26838426.pdf?src-supplier=Verical, ComponentLink4URL=https://datasheet.ciiva.com/26838/getdatasheetpartid-358410-26838426.pdf?src-supplier=Verical, Dielectric Material=Ceramic, Height=0.9mm, JESD-609 Code=e3, Length=1.6mm, Manufacturer Part Number=CL10B105KP8NNNC, Mount="Surface Mount", Multilayer=Yes, Number of Pins=2, Packaging="Tape and Reel", Positive Tolerance=10%, Pricing="4000=0.00532, 8000=0.0052, 16000=0.00508, 24000=0.00496, 32000=0.00484 (USD)", Reach SVHC Compliant=Yes, RoHS=Yes, RoHS Compliant=Yes, Size Code=0603, Stock=168000, Supplier 1=Avnet, Supplier Part Number 1=CL10B105KP8NNNC, Terminal Finish=Nickel, Termination=Wraparound, Width=0.8mm
CHRG D2 D9: library part D-SML-D12P8WT86, "Single Color LED, Pure Green, Diffused Milky White, 1.2mm", Color=Green, Forward Current-Max=20mA, Manufacturer=Rohm, Max Operating Temperature=85°C, Min Operating Temperature=-40°C, Reverse Voltage-Max=5V, Supplier Part Number 1=755-SML-D12P8WT86, Category=LEDs, Color@wavelength=Green, ComponentLink1description=https://datasheet.ciiva.com:443/pdfs/VipMasterIC/IC/ROHM/ROHMS10041/ROHMS10041-1.pdf?src-supplier=IHS+Markit, ComponentLink1URL=https://datasheet.ciiva.com:443/pdfs/VipMasterIC/IC/ROHM/ROHMS10041/ROHMS10041-1.pdf?src-supplier=IHS+Markit, ComponentLink2description=https://datasheet.ciiva.com/2110/sml-d1-2110417.pdf?src-supplier=Digikey, ComponentLink2URL=https://datasheet.ciiva.com/2110/sml-d1-2110417.pdf?src-supplier=Digikey, ComponentLink3Description=https://datasheet.ciiva.com/16488/rohm20sml-d12p8wt86-16488100.pdf?src-supplier=Future+Electronics, ComponentLink3URL=https://datasheet.ciiva.com/16488/rohm20sml-d12p8wt86-16488100.pdf?src-supplier=Future+Electronics, ComponentLink4Description=https://datasheet.ciiva.com/2110/sml-d1-2110419.pdf?src-supplier=Digikey, ComponentLink4URL=https://datasheet.ciiva.com/2110/sml-d1-2110419.pdf?src-supplier=Digikey, ComponentLink5Description=https://datasheet.ciiva.com/3161/sml-d1-3161420.pdf?src-supplier=Avnet, ComponentLink5URL=https://datasheet.ciiva.com/3161/sml-d1-3161420.pdf?src-supplier=Avnet, ComponentLink6Description=https://datasheet.ciiva.com/2110/sml-d1-2110418.pdf?src-supplier=Digikey, ComponentLink6URL=https://datasheet.ciiva.com/2110/sml-d1-2110418.pdf?src-supplier=Digikey, JESD-609 Code=e4, Lens Style=Diffused, Luminous Intensity-Nom=6.3mcd, Manufacturer Part Number=SML-D12P8WT86, Mount="Surface Mount", Number of Functions=1, Number of Pins=2, Optoelectronic Device Type="SINGLE COLOR LED", Overall Height=0.55mm, Packaging="Tape and Reel", Pricing="1=0.24, 10=0.133, 50=0.133, 100=0.057, 1000=0.045, 10000=0.035 (USD)", Reach SVHC Compliant=Yes, RoHS=Yes, RoHS Compliant=Yes, Shape=Rectangular, Size=1.2mm, Stock=44852, Supplier 1=Mouser, Terminal Finish=Gold, Terminal Pitch=1.65mm
D1 D10: "Rectifier Diode, Schottky, 1 Phase, 1 Element, 1A, 30V V(RRM), Silicon", Forward Voltage-Max (VF)=270mV, Manufacturer=Diodes, Manufacturer Part Number=BAT760-7, Max Operating Temperature=125°C, Max Output Current=1A, Max Power Dissipation=235mW, Min Operating Temperature=-65°C, Non-rep Pk Forward Current-Max=5.5A, Package Body Material=Plastic, Package Shape=Rectangular, Package Style="SMALL OUTLINEMeter", Peak Reflow Temperature (Cel)=260°C, Rep Pk Reverse Voltage-Max=30V, Supplier Part Number 1=4017860, Time @ Peak Reflow Temperature-Max (s)=40s, Additional Feature="HIGH RELIABILITY", Category="Rectifier Diodes", ComponentLink1description=https://datasheet.ciiva.com:443/pdfs/VipMasterIC/IC/DIOD/DIOD-S-A0004140720/DIOD-S-A0004140720-1.pdf?src-supplier=IHS+Markit, ComponentLink1URL=https://datasheet.ciiva.com:443/pdfs/VipMasterIC/IC/DIOD/DIOD-S-A0004140720/DIOD-S-A0004140720-1.pdf?src-supplier=IHS+Markit, ComponentLink2description=https://datasheet.ciiva.com/1178/ds30498-1178033.pdf?src-supplier=Element14, ComponentLink2URL=https://datasheet.ciiva.com/1178/ds30498-1178033.pdf?src-supplier=Element14, ComponentLink3Description=https://datasheet.ciiva.com/4715/ds30498-63155-4715521.pdf?src-supplier=Mouser, ComponentLink3URL=https://datasheet.ciiva.com/4715/ds30498-63155-4715521.pdf?src-supplier=Mouser, ComponentLink4Description=https://datasheet.ciiva.com/8301/ds30498-8301400.pdf?src-supplier=Avnet, ComponentLink4URL=https://datasheet.ciiva.com/8301/ds30498-8301400.pdf?src-supplier=Avnet, ComponentLink5Description=https://datasheet.ciiva.com/22695/1670989-22695799.pdf?src-supplier=Element14, ComponentLink5URL=https://datasheet.ciiva.com/22695/1670989-22695799.pdf?src-supplier=Element14, ComponentLink6Description=https://datasheet.ciiva.com/914/ds30498-914552.pdf?src-supplier=Digikey, ComponentLink6URL=https://datasheet.ciiva.com/914/ds30498-914552.pdf?src-supplier=Digikey, ComponentLink7Description=https://datasheet.ciiva.com/914/ds30498-914553.pdf?src-supplier=Digikey, ComponentLink7URL=https://datasheet.ciiva.com/914/ds30498-914553.pdf?src-supplier=Digikey, ComponentLink8Description=https://datasheet.ciiva.com/914/ds30498-914551.pdf?src-supplier=Digikey, ComponentLink8URL=https://datasheet.ciiva.com/914/ds30498-914551.pdf?src-supplier=Digikey, Diode Element Material=SILICON, Diode Type=RECTIFIER, JESD-30 Code=R-PDSO-G2, JESD-609 Code=e3, Moisture Sensitivity Level=1, Number of Elements=1, Number of Pins=2, Pricing="3000=0.0527, 9000=0.0507, 15000=0.0498, 45000=0.048, 75000=0.0464 (USD)", Qualification Status="Not Qualified", Reach SVHC Compliant=Yes, RoHS=Yes, RoHS Compliant=Yes, Stock=81000, Supplier 1="Future Electronics", Surface Mount=Yes, Technology=SCHOTTKY, Terminal Finish=Tin, Terminal Form="Gull Wing", Terminal Position=DUAL
D3: library part D-CDSOD323-T05LC, "Trans Voltage Suppressor Diode, 250W, 5V V(RWM), Bidirectional, 2 Element, Silicon", Manufacturer=Bourns, Min Breakdown Voltage=6V, Non-rep Peak Rev Power Dis-Max=250W, Package Body Material=Plastic, Package Shape=Rectangular, Package Style="SMALL OUTLINEMeter", Rep Pk Reverse Voltage-Max=5V, Category="TVS Diodes", ComponentLink1description=https://datasheet.ciiva.com:443/pdfs/VipMasterIC/IC/BOUR/BOUR-S-A0008993686/BOUR-S-A0008993686-1.pdf?src-supplier=IHS+Markit, ComponentLink1URL=https://datasheet.ciiva.com:443/pdfs/VipMasterIC/IC/BOUR/BOUR-S-A0008993686/BOUR-S-A0008993686-1.pdf?src-supplier=IHS+Markit, ComponentLink2description=https://datasheet.ciiva.com/22695/1845295-22695042.pdf?src-supplier=Element14, ComponentLink2URL=https://datasheet.ciiva.com/22695/1845295-22695042.pdf?src-supplier=Element14, ComponentLink3Description=https://datasheet.ciiva.com/15186/getdatasheetpartid-697240-15186741.pdf?src-supplier=Verical, ComponentLink3URL=https://datasheet.ciiva.com/15186/getdatasheetpartid-697240-15186741.pdf?src-supplier=Verical, ComponentLink4Description=https://datasheet.ciiva.com/6578/cdsod323-txxlc-6578183.pdf?src-supplier=Digikey, ComponentLink4URL=https://datasheet.ciiva.com/6578/cdsod323-txxlc-6578183.pdf?src-supplier=Digikey, ComponentLink5Description=https://datasheet.ciiva.com/1276/1845295-1276679.pdf?src-supplier=Element14, ComponentLink5URL=https://datasheet.ciiva.com/1276/1845295-1276679.pdf?src-supplier=Element14, ComponentLink6Description=https://datasheet.ciiva.com/11193/cdsod323-txxlc-11193757.pdf?src-supplier=Avnet, ComponentLink6URL=https://datasheet.ciiva.com/11193/cdsod323-txxlc-11193757.pdf?src-supplier=Avnet, ComponentLink7Description=https://datasheet.ciiva.com/6578/cdsod323-txxlc-6578182.pdf?src-supplier=Digikey, ComponentLink7URL=https://datasheet.ciiva.com/6578/cdsod323-txxlc-6578182.pdf?src-supplier=Digikey, ComponentLink8Description=https://datasheet.ciiva.com/6578/cdsod323-txxlc-6578181.pdf?src-supplier=Digikey, ComponentLink8URL=https://datasheet.ciiva.com/6578/cdsod323-txxlc-6578181.pdf?src-supplier=Digikey, ComponentLink9Description=https://datasheet.ciiva.com/48686/001055445-da-01-en-tvs-diode-cdsod323-t05lc-sod323-bou-48686300.pdf?src-supplier=Conrad, ComponentLink9URL=https://datasheet.ciiva.com/48686/001055445-da-01-en-tvs-diode-cdsod323-t05lc-sod323-bou-48686300.pdf?src-supplier=Conrad, Diode Element Material=SILICON, Diode Type="TRANS VOLTAGE SUPPRESSOR", JESD-30 Code=R-PDSO-G2, JESD-609 Code=e3, Manufacturer Part Number=CDSOD323-T05LC, Moisture Sensitivity Level=1, Number of Elements=2, Number of Pins=2, Polarity=Bidirectional, Pricing="3000=0.2698, 6000=0.2641, 12000=0.2584, 18000=0.2527, 24000=0.247, 30000=0.2413, 300000=0.2375 (USD)", Qualification Status="Not Qualified", Reach SVHC Compliant=Yes, RoHS=Yes, RoHS Compliant=Yes, Stock=12000, Supplier 1=Avnet, Supplier Part Number 1=CDSOD323-T05LC, Surface Mount=Yes, Technology=AVALANCHE, Terminal Finish=Tin, Terminal Form="Gull Wing", Terminal Position=DUAL
D4 D5: library part D-SML-D12U1WT86, "Single Color LED, Red, Milky White, 1.2mm", Color=Red, Forward Current-Max=20mA, Manufacturer=Rohm, Max Operating Temperature=85°C, Min Operating Temperature=-40°C, Supplier Part Number 1=755-SML-D12U1WT86, Category=LEDs, ComponentLink1description=https://datasheet.ciiva.com:443/pdfs/VipMasterIC/IC/ROHM/ROHM-S-A0002134492/ROHM-S-A0002134492-1.pdf?src-supplier=IHS+Markit, ComponentLink1URL=https://datasheet.ciiva.com:443/pdfs/VipMasterIC/IC/ROHM/ROHM-S-A0002134492/ROHM-S-A0002134492-1.pdf?src-supplier=IHS+Markit, ComponentLink2description=https://www.rohm.com/datasheet/SML-D12U1W?src-supplier=Digikey, ComponentLink2URL=https://www.rohm.com/datasheet/SML-D12U1W?src-supplier=Digikey, Lens Style="MILKY WHITE", Luminous Intensity-Nom=63mcd, Manufacturer Part Number=SML-D12U1WT86, Mount="Surface Mount", Number of Functions=1, Number of Pins=2, Optoelectronic Device Type="SINGLE COLOR LED", Overall Height=0.55mm, Packaging="Tape and Reel", Pricing="1=0.21, 10=0.11, 50=0.11, 100=0.059, 1000=0.059, 10000=0.05 (USD)", Reach SVHC Compliant=Yes, RoHS=Yes, RoHS Compliant=Yes, Shape=Rectangular, Size=1.2mm, Stock=135229, Supplier 1=Mouser, Terminal Pitch=1.65mm
D6 D7: library part D-SML-D12Y1WT86, "Single Color LED, Yellow, Milky White, 1.2mm", Color=Yellow, Forward Current-Max=20mA, Manufacturer=Rohm, Max Operating Temperature=85°C, Min Operating Temperature=-40°C, Supplier Part Number 1=755-SML-D12Y1WT86, Category=LEDs, ComponentLink1description=https://datasheet.ciiva.com:443/pdfs/VipMasterIC/IC/ROHM/ROHM-S-A0006508755/ROHM-S-A0006508755-1.pdf?src-supplier=IHS+Markit, ComponentLink1URL=https://datasheet.ciiva.com:443/pdfs/VipMasterIC/IC/ROHM/ROHM-S-A0006508755/ROHM-S-A0006508755-1.pdf?src-supplier=IHS+Markit, ComponentLink2description=https://www.rohm.com/datasheet/SML-D12Y1W?src-supplier=Digikey, ComponentLink2URL=https://www.rohm.com/datasheet/SML-D12Y1W?src-supplier=Digikey, Lens Style="MILKY WHITE", Luminous Intensity-Nom=100mcd, Manufacturer Part Number=SML-D12Y1WT86, Mount="Surface Mount", Number of Functions=1, Number of Pins=2, Optoelectronic Device Type="SINGLE COLOR LED", Overall Height=0.55mm, Packaging="Tape and Reel", Pricing="1=0.36, 10=0.192, 50=0.192, 100=0.085, 1000=0.066, 10000=0.044 (USD)", Reach SVHC Compliant=Yes, RoHS=Yes, RoHS Compliant=Yes, Shape=Rectangular, Size=1.2mm, Stock=42109, Supplier 1=Mouser, Terminal Pitch=1.65mm